# Altium PCB бив2-int_1b.PcbDoc
Units mm, origin at the board's own origin, x right, y up, seen from the top; angles counter-clockwise.
Board outline 32.85 x 33 mm, 2 copper layers (Top Layer, Bottom Layer), stack 2.071 mm thick; 2 components, 5 nets, 4 pads, 0 vias.
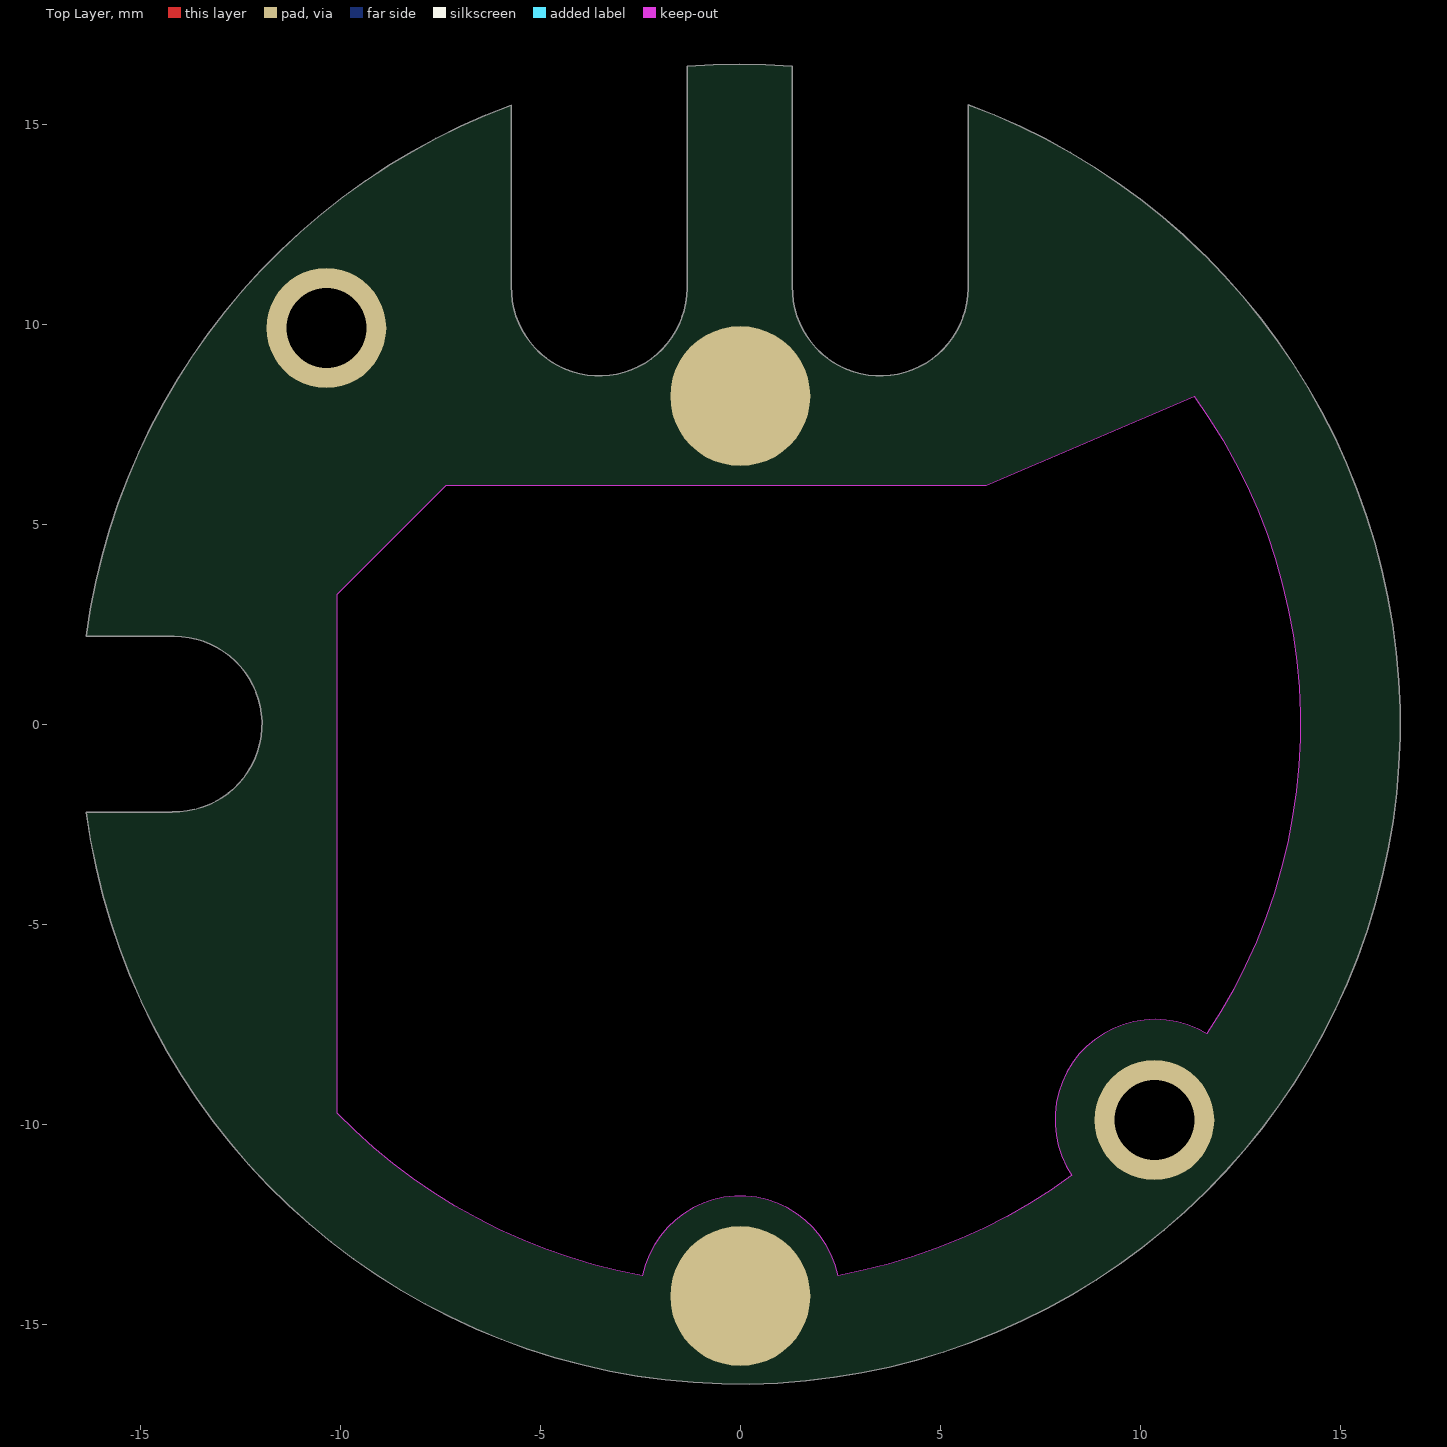
[diagram p0: Top Layer view]
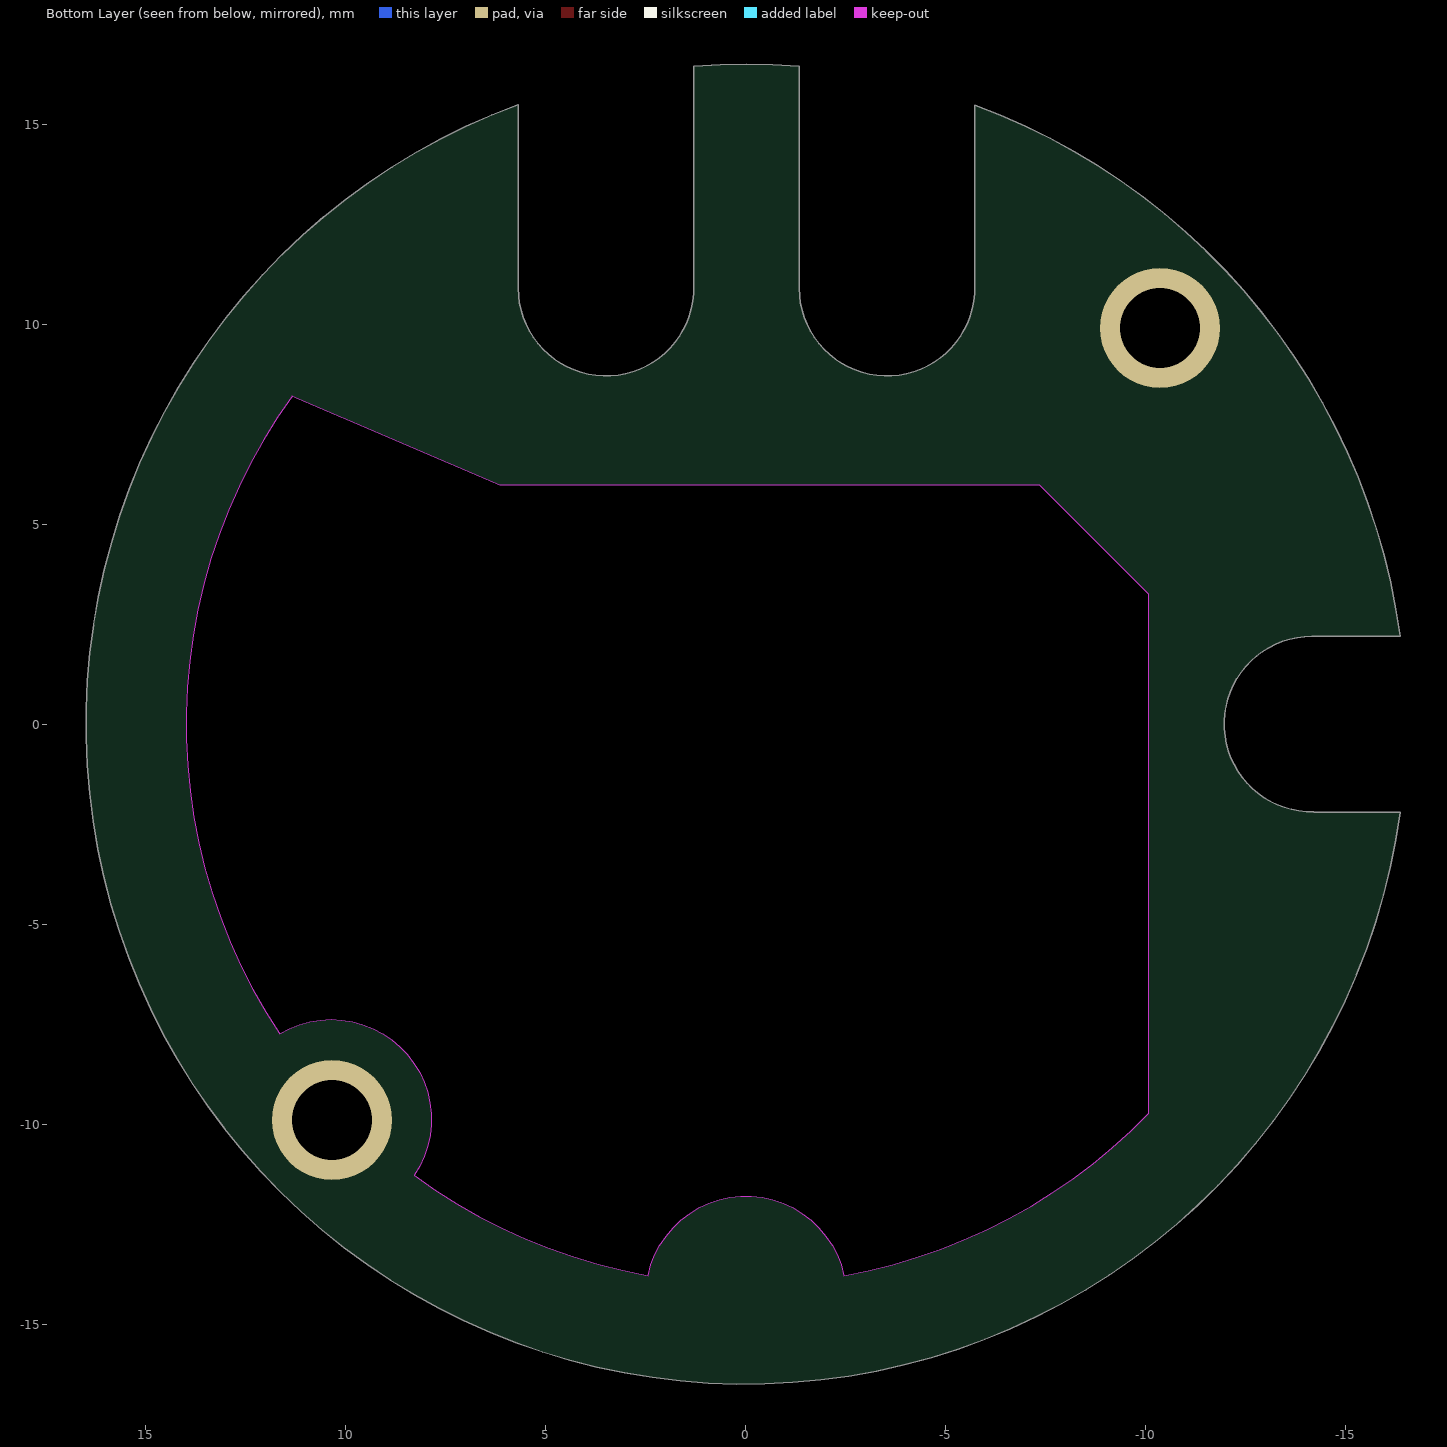
[diagram p1: Bottom Layer view, seen from below]

## Layer stack, top to bottom
Top Solder: solder mask 0.0102, Solder Resist, Dk 3.5
Top Layer: signal copper 0.0356
Dielectric1: core 2, FR-4, Dk 4.8
Bottom Layer: signal copper 0.0356
Bottom Solder: solder mask 0.0102, Solder Resist, Dk 3.5

## Board outline
-16.35,-2.2 -14.195,-2.2 -14.195,-2.195 ccw(c-14.15,0) -14.15,2.195 -16.35,2.195 -16.353,2.195 cw(c0,0) -5.724,15.475 -5.725,15.475 -5.725,10.945 -5.72,10.945 ccw(c-3.525,10.9) -1.33,10.9 -1.33,16.446 cw(c0,0) 1.3,16.449 1.3,16.45 1.3,10.945 1.305,10.945 ccw(c3.5,10.9) 5.695,10.9 5.695,15.479 5.697,15.485 cw(c0,0)
cut-out: -10.075,-9.725 -10.075,3.25 -7.35,5.975 6.15,5.975 11.35,8.2 11.348,8.199 cw(c0,0) 11.662,-7.746 ccw(c10.366,-9.884) 8.292,-11.28 cw(c0,0) 2.446,-13.785 ccw(c0,-14.3) -2.446,-13.785 cw(c0,0)

## Design rules (kind name [scope] priority, off if disabled: settings)
AcuteAngle [All] p1: minimum=4.40000000000000E+0001 checktracksonly=FALSE
Clearance Clearance_Bound [Not (OnBottomLayer Or OnTopLayer) vs IsBoardCutoutRegion Or IsBoardOutline] p1: gap=0.5
Clearance Clearance_Poly [inpoly] p2: gap=0.2
Clearance Clearance_in [(OnLayer('MidLayer1') OR OnLayer('MidLayer2'))] p3: gap=0.2
Clearance Clearance_out [(OnLayer('Bottom Layer') OR OnLayer('Top Layer'))] p4: gap=0.15
HoleSize [All] p1: absolutevalues=TRUE maxlimit=2.54 minlimit=0.2 maxpercent=80.000 minpercent=20.000
MinimumAnnularRing [All] p1: minimumring=0.25
MinimumSolderMaskSliver [All] p1: minsoldermaskwidth=0
NetAntennae [All] p1: netantennaetolerance=5
PermittedLayers [All] p1: toplayerpermitted=TRUE bottomlayerpermitted=TRUE
PolygonConnect PolygonConnect_via [isvia] p1: connectstyle=Direct reliefconductorwidth=0.254 reliefentries=4 polygonreliefangle="90 Angle" airgapwidth=0.254
PolygonConnect [All] p2: connectstyle=Relief reliefconductorwidth=0.254 reliefentries=4 polygonreliefangle="45 Angle" airgapwidth=0.254
RoomDefinition бив2-bot_1a [InComponentClass('бив2-bot_1a')] p1: confinementstyle=ConfineIn formatcopy=TRUE lockcomponents=FALSE outline 22.632,-15.075 53.984,-15.075 53.984,-4.849 22.632,-4.849
RoutingVias [All] p1: holewidth=0.3 width=0.8 viastyle="Through Hole" minholewidth=0.2 minwidth=0.6 maxholewidth=0.4 maxwidth=1.27
SMDNeckDown [All] p1: percent=100.000
SMDToCorner [All] p1: distance=59055
SMDToPlane [All] p1: distance=0
SilkToSilkClearance [All] p1: silktosilkclearance=0.15
SilkToSolderMaskClearance SilkscreenOverComponentPads [IsPad] p1: minsilkscreentomaskgap=0.15 clearancetoexposedcopper=TRUE
SolderMaskExpansion [All] p1: expansion=0.1
ViasUnderSMD [All] p1: allowed=TRUE
Width [All] p1: maxlimit=3 minlimit=0.15 preferedwidth=0.25 minimp=50.000000 maximp=50.000000 favimp=50.000000
25 further rules are at their usual default settings.

## Components (designator, comment, footprint, x,y, rotation, side; value= is the part's Value field where it differs from the comment)
+ "Testpoint-TH-1.5mm" "1.5mm PAD" -18.45,-2.6 r0 top net-tie
- "Testpoint-TH-1.5mm" "1.5mm PAD" -18.475,2.3 r0 top net-tie

## Footprints (in the part's own frame and the unit in brackets; to place one, negate y for a bottom-side part, rotate by r counter-clockwise, add the part's x,y. Pads: shape width x height; smd on the part's side, far side on the other; paste and mask are expansions set on the pad)
"1.5mm PAD" [mm]

## Part data
+ -: "Dummy Pad"

## Free pads (board coordinates)
  round 3 hole 2: 2(-10.35,9.9) 2(10.35,-9.9)
  round 3.5 smd: 2(0,-14.3) 2(0,8.2)

## Nets (pads, with @x,y where several pads share a name; then routed paths per layer and width w, separated by ;. In a path a pad name is that pad's centre, name@x,y a point inside that pad or via, vN(x,y) a via of type N, cw(c..) or ccw(c..) an arc to the next point about the centre after c; other vN are vias at no path point)
-: 
BAT: 
Net+_0: 
NetR1_2: 
NetR3_2: 

## Silkscreen, mask and mechanical layers (free items; w line width, h text height)
Mechanical 3:
  lines w0.1: -15.244,-6.281 -15.225,-6.3
Mechanical 4:
  lines w0.1: -16.353,2.195 cw(c0,0) -5.724,15.475 -5.725,10.945 ; -16.353,-2.2 ccw(c0,0) 5.697,15.485 ; -16.35,-2.2 -14.195,-2.2 ; -16.35,2.195 -14.15,2.195 cw(c-14.15,0) -14.195,-2.195 ; -10.121,6.432 -10.104,6.415 ; -10.075,-9.725 -10.075,3.25 -7.35,5.975 6.15,5.975 11.35,8.2 ; -10.071,-9.725 ccw(c0,0) -2.446,-13.785 ; -5.72,10.945 ccw(c-3.525,10.9) -1.33,10.9 -1.33,16.446 cw(c0,0) 1.3,16.449 ; -2.446,-13.785 cw(c0,-14.3) 2.446,-13.785 ccw(c0,0) 8.292,-11.28 cw(c10.366,-9.884) 11.662,-7.746 ccw(c0,0) 11.348,8.199 ; 1.3,10.945 1.3,16.45 ; 1.305,10.945 ccw(c3.5,10.9) 5.695,10.9 5.695,15.479